# Altium PCB STM32F302VC_EVM.PcbDoc (part 9 of 19)
Units mil, origin at the board's own origin, x right, y up, seen from the top; angles counter-clockwise.
Board outline 3937.01 x 3937.01 mil, 2 copper layers (Top Layer, Bottom Layer); 117 components, 166 nets, 602 pads, 373 vias.
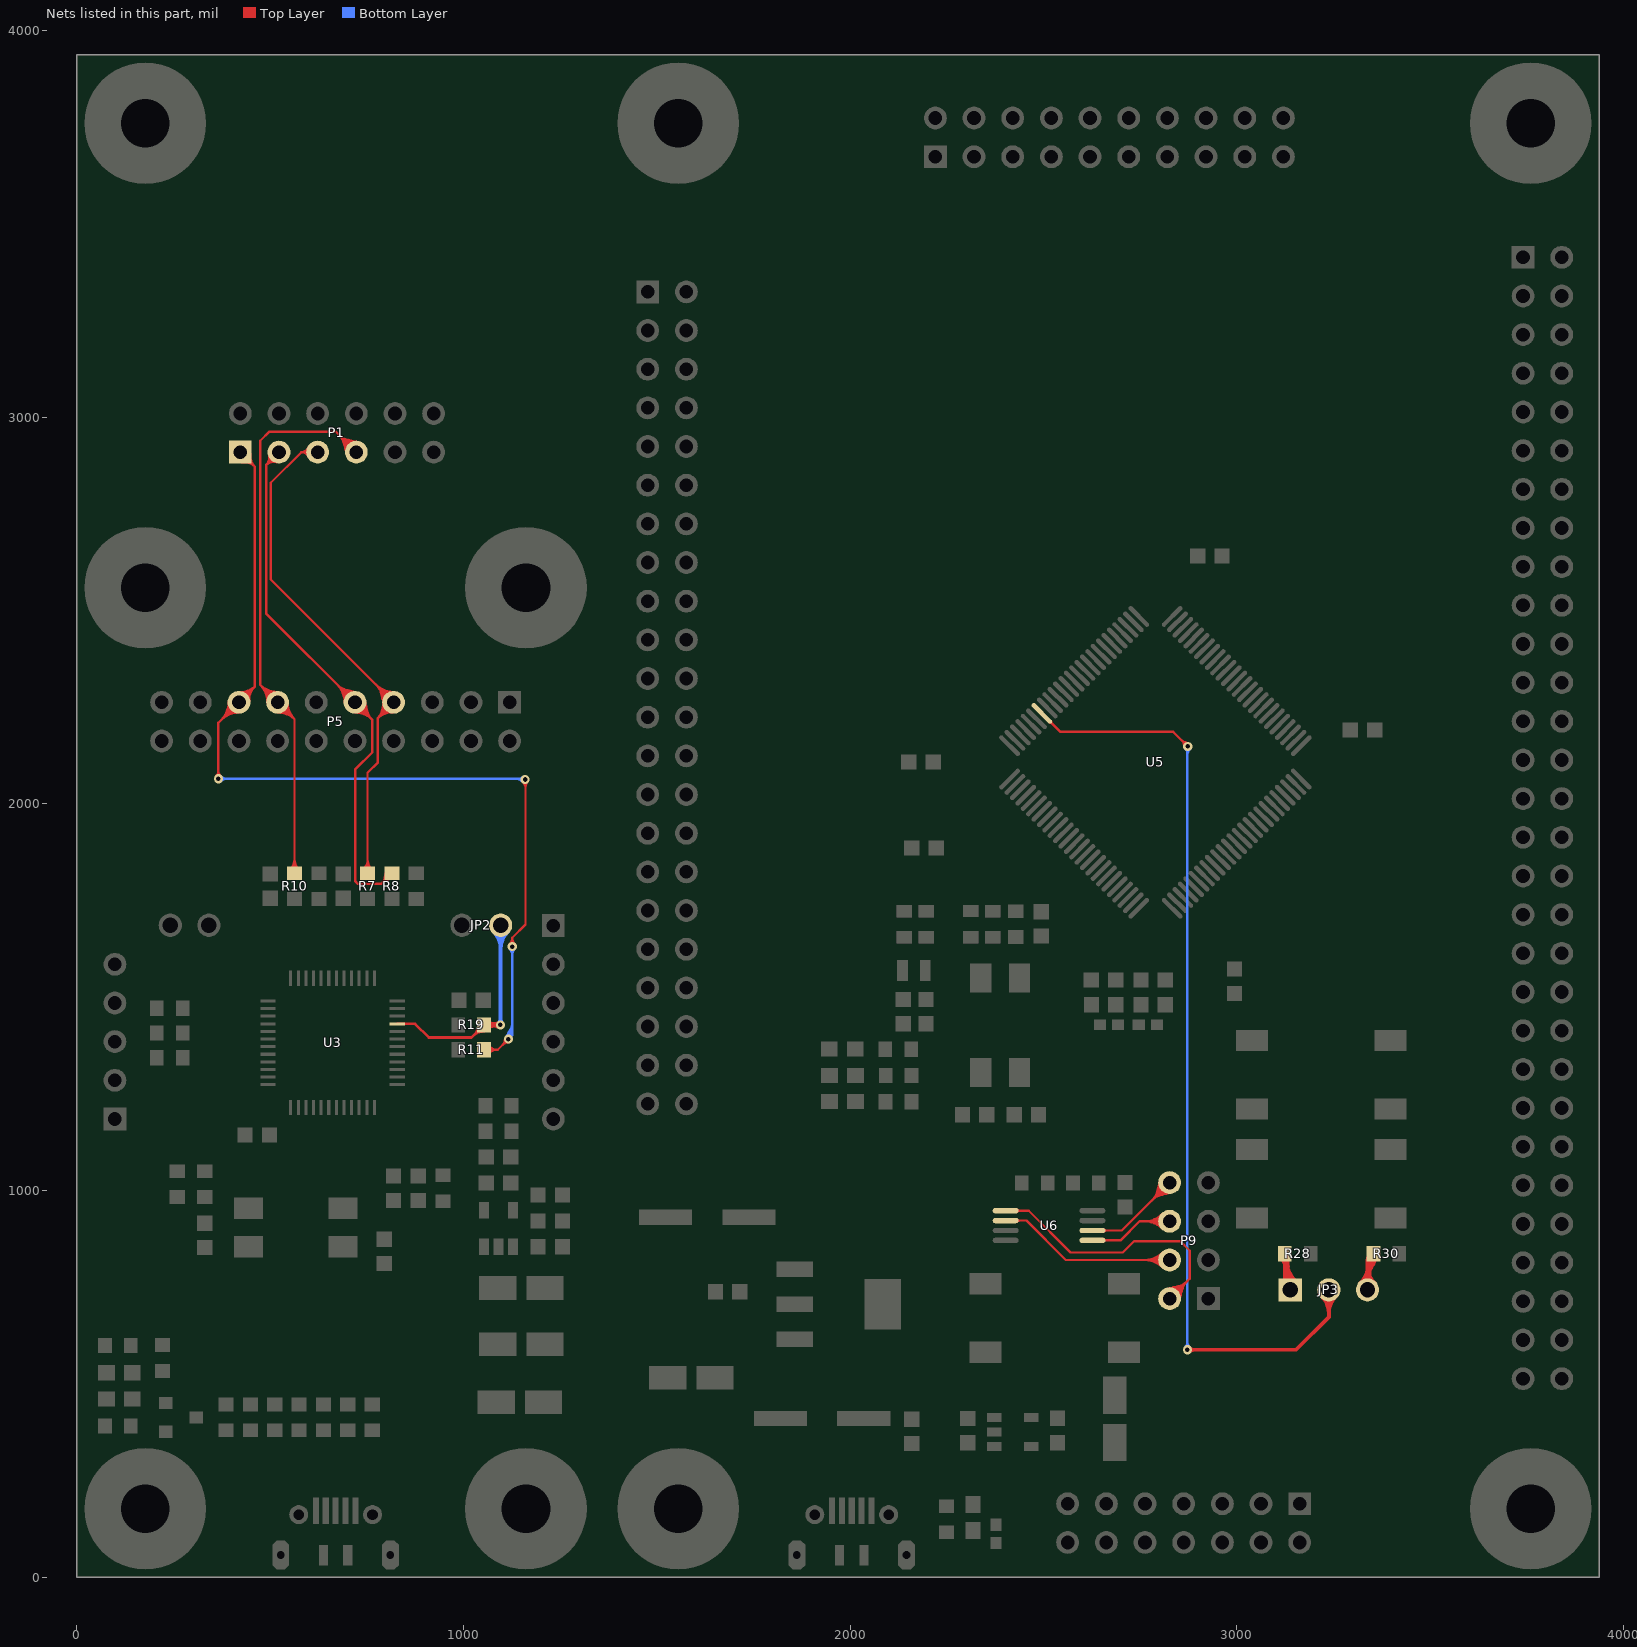
[diagram p9: the nets of this part, all layers, seen from the top]

## Via types
v1: diameter 23.62, hole 11.81, Top Layer to Bottom Layer, tented both sides, 372 vias
v2: diameter 50, hole 28, Top Layer to Bottom Layer, tented both sides, 1 vias

## Nets (pads, with @x,y where several pads share a name; then routed paths per layer and width w, separated by ;. In a path a pad name is that pad's centre, name@x,y a point inside that pad or via, vN(x,y) a via of type N, cw(c..) or ccw(c..) an arc to the next point about the centre after c; other vN are vias at no path point) (continued)
NetJP2_2: JP2.2 R19.2 U3.21 | length 1825.2
  Top Layer w7: U3.21@828.74,1431.1 875,1431.1 910.43,1395.67 1020.67,1395.67 R19.2@1053.15,1428.15 ; 1025.52,1400.52 cw(c1053.15,1372.89) R19.2@1053.15,1411.96 ; 1025.52,1400.52 cw(c1053.15,1372.89) R19.2@1053.15,1411.96 ; 1025.52,1400.52 cw(c1053.15,1372.89) R19.2@1053.15,1411.96 ; 1030.27,1405.27 ccw(c1009.36,1426.18) R19.2@1038.93,1426.18 ; 1030.27,1405.27 ccw(c1009.36,1426.18) R19.2@1038.93,1426.18 ; 1030.27,1405.27 ccw(c1009.36,1426.18) R19.2@1038.93,1426.18 ; 1034.36,1409.12 cw(c1056.66,1403.14) R19.2@1053.18,1425.97 ; 1034.36,1409.12 cw(c1056.66,1403.14) R19.2@1053.18,1425.97 ; 1034.36,1409.12 cw(c1056.66,1403.14) R19.2@1053.18,1425.97 ; R19.2@1037.47,1412.47 cw(c1053.15,1396.79) R19.2@1053.15,1418.96 ; R19.2@1037.47,1412.47 cw(c1053.15,1396.79) R19.2@1053.15,1418.96 ; R19.2@1037.47,1412.47 cw(c1053.15,1396.79) R19.2@1053.15,1418.96
  Top Layer w10: R19.2@1053.15,1428.15 v1(1095.47,1428.15) ; R19.2@1062.14,1419.16 cw(c1083.85,1397.45) v1@1083.85,1428.15 ; R19.2@1062.14,1419.16 cw(c1083.85,1397.45) v1@1083.85,1428.15 ; R19.2@1062.14,1419.16 cw(c1083.85,1397.45) v1@1083.85,1428.15 ; R19.2@1062.14,1437.14 ccw(c1083.85,1458.85) v1@1083.85,1428.15 ; R19.2@1062.14,1437.14 ccw(c1083.85,1458.85) v1@1083.85,1428.15 ; R19.2@1062.14,1437.14 ccw(c1083.85,1458.85) v1@1083.85,1428.15 ; 1073.53,1425.39 cw(c1079.37,1403.62) v1@1091.73,1422.46 ; 1073.53,1425.39 cw(c1079.37,1403.62) v1@1091.73,1422.46 ; 1073.53,1425.39 cw(c1079.37,1403.62) v1@1091.73,1422.46 ; 1073.53,1425.39 cw(c1079.37,1403.62) v1@1091.73,1422.46 ; 1073.53,1425.39 cw(c1079.37,1403.62) v1@1091.73,1422.46 ; 1073.53,1425.39 cw(c1079.37,1403.62) v1@1091.73,1422.46 ; 1073.53,1430.91 ccw(c1079.37,1452.68) v1@1091.73,1433.84 ; 1073.53,1430.91 ccw(c1079.37,1452.68) v1@1091.73,1433.84 ; 1073.53,1430.91 ccw(c1079.37,1452.68) v1@1091.73,1433.84 ; 1073.53,1430.91 ccw(c1079.37,1452.68) v1@1091.73,1433.84 ; 1073.53,1430.91 ccw(c1079.37,1452.68) v1@1091.73,1433.84 ; 1073.53,1430.91 ccw(c1079.37,1452.68) v1@1091.73,1433.84 ; 1079.03,1428.15 cw(c1079.03,1411.71) v1@1090.66,1423.33 ; 1079.03,1428.15 ccw(c1079.03,1444.59) v1@1090.66,1432.97 ; 1079.03,1428.15 ccw(c1079.03,1444.59) v1@1090.66,1432.97 ; 1079.03,1428.15 cw(c1079.03,1411.71) v1@1090.66,1423.33 ; 1079.03,1428.15 ccw(c1079.03,1444.59) v1@1090.66,1432.97 ; 1079.03,1428.15 cw(c1079.03,1411.71) v1@1090.66,1423.33
  Bottom Layer w10: v1@1096.06,1432.48 JP2.2@1096.06,1686.02 ; JP2.2@1078.39,1668.34 cw(c1035.71,1625.66) 1096.06,1625.66 ; JP2.2@1078.39,1668.34 cw(c1035.71,1625.66) 1096.06,1625.66 ; JP2.2@1078.39,1668.34 cw(c1035.71,1625.66) 1096.06,1625.66 ; JP2.2@1085.46,1675.41 cw(c1059.85,1649.8) 1096.06,1649.8 ; JP2.2@1085.46,1675.41 cw(c1059.85,1649.8) 1096.06,1649.8 ; JP2.2@1085.46,1675.41 cw(c1059.85,1649.8) 1096.06,1649.8 ; v1@1090.66,1432.97 ccw(c1077.6,1446.02) 1096.06,1446.02 ; v1@1090.66,1432.97 ccw(c1077.6,1446.02) 1096.06,1446.02 ; v1@1090.66,1432.97 ccw(c1077.6,1446.02) 1096.06,1446.02 ; 1096.06,1443.17 ccw(c1110.49,1443.17) v1@1100.29,1432.97 ; 1096.06,1443.17 ccw(c1110.49,1443.17) v1@1100.29,1432.97 ; 1096.06,1443.17 ccw(c1110.49,1443.17) v1@1100.29,1432.97 ; 1096.06,1625.66 cw(c1156.42,1625.66) JP2.2@1113.74,1668.34 ; 1096.06,1625.66 cw(c1156.42,1625.66) JP2.2@1113.74,1668.34 ; 1096.06,1625.66 cw(c1156.42,1625.66) JP2.2@1113.74,1668.34 ; 1096.06,1649.8 cw(c1132.28,1649.8) JP2.2@1106.67,1675.41 ; 1096.06,1649.8 cw(c1132.28,1649.8) JP2.2@1106.67,1675.41 ; 1096.06,1649.8 cw(c1132.28,1649.8) JP2.2@1106.67,1675.41
NetJP3_1: JP3.1 R28.1 | length 1007.6
  Top Layer w10: JP3.1@3137.8,743.11 3124.02,756.89 R28.1@3124.02,836.61 ; R28.1@3115.02,825.65 cw(c3093.32,803.95) 3124.02,803.95 ; R28.1@3115.02,825.65 cw(c3093.32,803.95) 3124.02,803.95 ; R28.1@3115.02,825.65 cw(c3093.32,803.95) 3124.02,803.95 ; R28.1@3117.36,823.81 cw(c3100.47,796.33) 3131.85,803.82 ; R28.1@3117.36,823.81 cw(c3100.47,796.33) 3131.85,803.82 ; R28.1@3117.36,823.81 cw(c3100.47,796.33) 3131.85,803.82 ; JP3.1@3120.12,760.79 ccw(c3110.71,770.2) JP3.1@3124.02,770.2 ; JP3.1@3120.12,760.79 ccw(c3110.71,770.2) JP3.1@3124.02,770.2 ; JP3.1@3120.12,760.79 ccw(c3110.71,770.2) JP3.1@3124.02,770.2 ; 3124.02,788.39 ccw(c3182.99,788.39) JP3.1@3141.33,746.65 ; 3124.02,788.39 ccw(c3182.99,788.39) JP3.1@3141.33,746.65 ; 3124.02,788.39 ccw(c3182.99,788.39) JP3.1@3141.33,746.65 ; 3124.02,803.95 cw(c3154.72,803.95) R28.1@3133.01,825.65 ; 3124.02,803.95 cw(c3154.72,803.95) R28.1@3133.01,825.65 ; 3124.02,803.95 cw(c3154.72,803.95) R28.1@3133.01,825.65 ; 3124.02,812.5 ccw(c3207.06,812.5) JP3.1@3148.39,753.73 ; 3124.02,812.5 ccw(c3207.06,812.5) JP3.1@3148.39,753.73 ; 3124.02,812.5 ccw(c3207.06,812.5) JP3.1@3148.39,753.73 ; R28.1@3124.02,836.61 ccw(c3231.12,836.61) JP3.1@3155.46,760.8 ; R28.1@3124.02,836.61 ccw(c3231.12,836.61) JP3.1@3155.46,760.8 ; R28.1@3124.02,836.61 ccw(c3231.12,836.61) JP3.1@3155.46,760.8 ; 3131.34,805.96 cw(c3159.68,812.73) R28.1@3134.85,827.99 ; 3131.34,805.96 cw(c3159.68,812.73) R28.1@3134.85,827.99 ; 3131.34,805.96 cw(c3159.68,812.73) R28.1@3134.85,827.99
NetJP3_2: JP3.2 U5.94 | length 3396.4
  Top Layer w6: U5.94@2495.67,2233.95 2543.6,2186.02 2835.63,2186.02 v1(2873.03,2148.62) ; U5.94@2516.55,2210.17 cw(c2516.55,2203.15) 2521.51,2208.11 ; U5.94@2516.55,2210.17 cw(c2516.55,2203.15) 2521.51,2208.11 ; U5.94@2516.55,2210.17 cw(c2516.55,2203.15) 2521.51,2208.11 ; U5.94@2519.45,2213.07 ccw(c2526.47,2213.07) 2521.51,2208.11 ; U5.94@2519.45,2213.07 ccw(c2526.47,2213.07) 2521.51,2208.11 ; U5.94@2519.45,2213.07 ccw(c2526.47,2213.07) 2521.51,2208.11 ; 2857.99,2163.66 cw(c2842.95,2148.62) v1@2864.22,2148.62 ; 2857.99,2163.66 ccw(c2873.03,2178.7) v1@2873.03,2157.43 ; 2857.99,2163.66 ccw(c2873.03,2178.7) v1@2873.03,2157.43 ; 2857.99,2163.66 cw(c2842.95,2148.62) v1@2864.22,2148.62 ; 2857.99,2163.66 ccw(c2873.03,2178.7) v1@2873.03,2157.43 ; 2857.99,2163.66 cw(c2842.95,2148.62) v1@2864.22,2148.62 ; 2862.58,2154.74 ccw(c2874.96,2158.06) v1@2872.39,2145.5 ; 2862.58,2154.74 ccw(c2874.96,2158.06) v1@2872.39,2145.5 ; 2862.58,2154.74 ccw(c2874.96,2158.06) v1@2872.39,2145.5 ; 2866.92,2159.07 cw(c2863.6,2146.69) v1@2876.16,2149.26 ; 2866.92,2159.07 cw(c2863.6,2146.69) v1@2876.16,2149.26 ; 2866.92,2159.07 cw(c2863.6,2146.69) v1@2876.16,2149.26
  Top Layer w10: v1(2871.86,588.14) 3153.1,588.14 3237.8,672.83 JP3.2@3237.8,743.11 ; v1@2876.67,583.32 cw(c2888.3,571.7) 2888.3,588.14 ; v1@2876.67,583.32 cw(c2888.3,571.7) 2888.3,588.14 ; v1@2876.67,583.32 cw(c2888.3,571.7) 2888.3,588.14 ; v1@2876.67,592.96 ccw(c2888.3,604.58) 2888.3,588.14 ; v1@2876.67,592.96 ccw(c2888.3,604.58) 2888.3,588.14 ; v1@2876.67,592.96 ccw(c2888.3,604.58) 2888.3,588.14 ; JP3.2@3220.12,725.43 cw(c3177.44,682.75) 3237.8,682.75 ; JP3.2@3220.12,725.43 cw(c3177.44,682.75) 3237.8,682.75 ; JP3.2@3220.12,725.43 cw(c3177.44,682.75) 3237.8,682.75 ; JP3.2@3227.19,732.5 cw(c3201.58,706.9) 3237.8,706.9 ; JP3.2@3227.19,732.5 cw(c3201.58,706.9) 3237.8,706.9 ; JP3.2@3227.19,732.5 cw(c3201.58,706.9) 3237.8,706.9 ; 3237.8,682.75 cw(c3298.15,682.75) JP3.2@3255.47,725.43 ; 3237.8,682.75 cw(c3298.15,682.75) JP3.2@3255.47,725.43 ; 3237.8,682.75 cw(c3298.15,682.75) JP3.2@3255.47,725.43 ; 3237.8,706.9 cw(c3274.01,706.9) JP3.2@3248.4,732.5 ; 3237.8,706.9 cw(c3274.01,706.9) JP3.2@3248.4,732.5 ; 3237.8,706.9 cw(c3274.01,706.9) JP3.2@3248.4,732.5
  Bottom Layer w6: v1(2871.86,588.14) 2871.86,2147.45 v1(2873.03,2148.62) ; v1@2865.63,594.37 ccw(c2850.59,609.41) 2871.86,609.41 ; v1@2865.63,594.37 ccw(c2850.59,609.41) 2871.86,609.41 ; v1@2865.63,594.37 ccw(c2850.59,609.41) 2871.86,609.41 ; v1@2866.8,2142.39 cw(c2854.59,2130.18) 2871.86,2130.18 ; v1@2866.8,2142.39 cw(c2854.59,2130.18) 2871.86,2130.18 ; v1@2866.8,2142.39 cw(c2854.59,2130.18) 2871.86,2130.18 ; 2871.86,609.41 ccw(c2893.13,609.41) v1@2878.09,594.37 ; 2871.86,609.41 ccw(c2893.13,609.41) v1@2878.09,594.37 ; 2871.86,609.41 ccw(c2893.13,609.41) v1@2878.09,594.37 ; 2871.86,2124.52 cw(c2897.14,2124.52) v1@2879.26,2142.39 ; 2871.86,2124.52 cw(c2897.14,2124.52) v1@2879.26,2142.39 ; 2871.86,2124.52 cw(c2897.14,2124.52) v1@2879.26,2142.39
NetJP3_3: JP3.3 R30.1 | length 1813.5
  Top Layer w10: JP3.3@3337.8,743.11 3337.8,821.06 R30.1@3353.35,836.61 ; JP3.3@3320.12,760.79 ccw(c3277.44,803.47) 3337.8,803.47 ; JP3.3@3320.12,760.79 ccw(c3277.44,803.47) 3337.8,803.47 ; JP3.3@3320.12,760.79 ccw(c3277.44,803.47) 3337.8,803.47 ; JP3.3@3324.42,764.23 ccw(c3301.45,800.5) 3343.34,791.1 ; JP3.3@3324.42,764.23 ccw(c3301.45,800.5) 3343.34,791.1 ; JP3.3@3324.42,764.23 ccw(c3301.45,800.5) 3343.34,791.1 ; JP3.3@3324.42,764.23 ccw(c3301.45,800.5) 3343.34,791.1 ; JP3.3@3324.42,764.23 ccw(c3301.45,800.5) 3343.34,791.1 ; JP3.3@3324.42,764.23 ccw(c3301.45,800.5) 3343.34,791.1 ; JP3.3@3327.19,753.72 ccw(c3301.58,779.32) 3337.8,779.32 ; JP3.3@3327.19,753.72 ccw(c3301.58,779.32) 3337.8,779.32 ; JP3.3@3327.19,753.72 ccw(c3301.58,779.32) 3337.8,779.32 ; JP3.3@3337.8,766.4 cw(c3421.59,766.4) R30.1@3362.34,825.65 ; JP3.3@3337.8,766.4 cw(c3421.59,766.4) R30.1@3362.34,825.65 ; JP3.3@3337.8,766.4 cw(c3421.59,766.4) R30.1@3362.34,825.65 ; 3337.8,779.32 ccw(c3374.01,779.32) JP3.3@3348.4,753.72 ; 3337.8,779.32 ccw(c3374.01,779.32) JP3.3@3348.4,753.72 ; 3337.8,779.32 ccw(c3374.01,779.32) JP3.3@3348.4,753.72 ; 3337.8,790.54 cw(c3397.45,790.54) R30.1@3355.27,832.72 ; 3337.8,790.54 cw(c3397.45,790.54) R30.1@3355.27,832.72 ; 3337.8,790.54 cw(c3397.45,790.54) R30.1@3355.27,832.72 ; 3337.8,803.47 ccw(c3398.15,803.47) JP3.3@3355.47,760.79 ; 3337.8,803.47 ccw(c3398.15,803.47) JP3.3@3355.47,760.79 ; 3337.8,803.47 ccw(c3398.15,803.47) JP3.3@3355.47,760.79 ; 3337.8,814.69 cw(c3373.31,814.69) R30.1@3348.2,839.8 ; 3337.8,814.69 cw(c3373.31,814.69) R30.1@3348.2,839.8 ; 3337.8,814.69 cw(c3373.31,814.69) R30.1@3348.2,839.8 ; 3339.93,775.93 ccw(c3360.72,771.26) JP3.3@3347.27,754.74 ; 3339.93,775.93 ccw(c3360.72,771.26) JP3.3@3347.27,754.74 ; 3339.93,775.93 ccw(c3360.72,771.26) JP3.3@3347.27,754.74 ; 3339.93,775.93 ccw(c3360.72,771.26) JP3.3@3347.27,754.74 ; 3339.93,775.93 ccw(c3360.72,771.26) JP3.3@3347.27,754.74 ; 3339.93,775.93 ccw(c3360.72,771.26) JP3.3@3347.27,754.74 ; 3340.59,807.3 ccw(c3319.44,819.5) R30.1@3341.74,829.46 ; 3340.59,807.3 ccw(c3319.44,819.5) R30.1@3341.74,829.46 ; 3340.59,807.3 ccw(c3319.44,819.5) R30.1@3341.74,829.46 ; R30.1@3343.08,827.14 cw(c3319.99,810.27) 3344.6,795.7 ; R30.1@3343.08,827.14 cw(c3319.99,810.27) 3344.6,795.7 ; R30.1@3343.08,827.14 cw(c3319.99,810.27) 3344.6,795.7 ; 3343.47,791.69 ccw(c3372.12,785.26) JP3.3@3353.58,762.5 ; 3343.47,791.69 ccw(c3372.12,785.26) JP3.3@3353.58,762.5 ; 3343.47,791.69 ccw(c3372.12,785.26) JP3.3@3353.58,762.5 ; 3343.47,791.69 ccw(c3372.12,785.26) JP3.3@3353.58,762.5 ; 3343.47,791.69 ccw(c3372.12,785.26) JP3.3@3353.58,762.5 ; 3343.47,791.69 ccw(c3372.12,785.26) JP3.3@3353.58,762.5 ; 3343.44,812.23 cw(c3362.27,801.36) R30.1@3356.64,822.36 ; 3343.44,812.23 cw(c3362.27,801.36) R30.1@3356.64,822.36 ; 3343.44,812.23 cw(c3362.27,801.36) R30.1@3356.64,822.36 ; R30.1@3351.15,833.04 cw(c3333.32,820.01) 3352.32,808.75 ; R30.1@3351.15,833.04 cw(c3333.32,820.01) 3352.32,808.75 ; R30.1@3351.15,833.04 cw(c3333.32,820.01) 3352.32,808.75
NetP1_1: P1.1 P5.15 R11.2 | length 6250
  Top Layer w6: v1(366.14,2064.96) 366.14,2209.45 P5.15@419.29,2262.6 460.44,2303.75 ; P1.1@422.83,2909.45 460.44,2871.84 ; R11.2@1053.15,1364.17 1088.58,1364.17 ; v1(1116.14,1391.73) 1088.58,1364.17 ; v1(1125.98,1630.91) 1125.98,1653.54 1160.43,1687.99 1160.43,2058.07 1155.51,2062.99 v1(1159.45,2062.99) ; v1@359.91,2071.19 ccw(c344.87,2086.23) 366.14,2086.23 ; v1@359.91,2071.19 ccw(c344.87,2086.23) 366.14,2086.23 ; v1@359.91,2071.19 ccw(c344.87,2086.23) 366.14,2086.23 ; 366.14,2086.23 ccw(c387.41,2086.23) v1@372.37,2071.19 ; 366.14,2086.23 ccw(c387.41,2086.23) v1@372.37,2071.19 ; 366.14,2086.23 ccw(c387.41,2086.23) v1@372.37,2071.19 ; 374.01,2217.31 cw(c419.29,2172.03) P5.15@419.29,2236.07 ; 374.01,2217.31 ccw(c328.72,2262.6) P5.15@392.76,2262.6 ; 374.01,2217.31 ccw(c328.72,2262.6) P5.15@392.76,2262.6 ; 374.01,2217.31 cw(c419.29,2172.03) P5.15@419.29,2236.07 ; 374.01,2217.31 ccw(c328.72,2262.6) P5.15@392.76,2262.6 ; 374.01,2217.31 cw(c419.29,2172.03) P5.15@419.29,2236.07 ; 384.25,2227.56 cw(c419.29,2192.51) P5.15@419.29,2242.07 ; 384.25,2227.56 ccw(c349.21,2262.6) P5.15@398.76,2262.6 ; 384.25,2227.56 ccw(c349.21,2262.6) P5.15@398.76,2262.6 ; 384.25,2227.56 cw(c419.29,2192.51) P5.15@419.29,2242.07 ; 384.25,2227.56 ccw(c349.21,2262.6) P5.15@398.76,2262.6 ; 384.25,2227.56 cw(c419.29,2192.51) P5.15@419.29,2242.07 ; 391.99,2237.31 cw(c421.77,2229.33) P5.15@419.48,2260.08 ; 391.99,2237.31 cw(c421.77,2229.33) P5.15@419.48,2260.08 ; 391.99,2237.31 cw(c421.77,2229.33) P5.15@419.48,2260.08 ; 394,2235.29 ccw(c386.02,2265.08) P5.15@416.77,2262.79 ; 394,2235.29 ccw(c386.02,2265.08) P5.15@416.77,2262.79 ; 394,2235.29 ccw(c386.02,2265.08) P5.15@416.77,2262.79 ; 394.18,2245.47 cw(c421.11,2238.26) P5.15@419.03,2266.06 ; 394.18,2245.47 cw(c421.11,2238.26) P5.15@419.03,2266.06 ; 394.18,2245.47 cw(c421.11,2238.26) P5.15@419.03,2266.06 ; 394.49,2237.8 cw(c419.29,2213) P5.15@419.29,2248.07 ; 394.49,2237.8 ccw(c369.69,2262.6) P5.15@404.76,2262.6 ; 394.49,2237.8 ccw(c369.69,2262.6) P5.15@404.76,2262.6 ; 394.49,2237.8 cw(c419.29,2213) P5.15@419.29,2248.07 ; 394.49,2237.8 ccw(c369.69,2262.6) P5.15@404.76,2262.6 ; 394.49,2237.8 cw(c419.29,2213) P5.15@419.29,2248.07 ; 402.17,2237.48 ccw(c394.95,2264.41) P5.15@422.75,2262.34 ; 402.17,2237.48 ccw(c394.95,2264.41) P5.15@422.75,2262.34 ; 402.17,2237.48 ccw(c394.95,2264.41) P5.15@422.75,2262.34 ; P5.15@415.94,2263.52 cw(c447.65,2254.8) 441.39,2287.09 ; P5.15@415.94,2263.52 cw(c447.65,2254.8) 441.39,2287.09 ; P5.15@415.94,2263.52 cw(c447.65,2254.8) 441.39,2287.09 ; P5.15@420.21,2259.25 ccw(c411.49,2290.96) 443.78,2284.69 ; P5.15@420.21,2259.25 ccw(c411.49,2290.96) 443.78,2284.69 ; P5.15@420.21,2259.25 ccw(c411.49,2290.96) 443.78,2284.69 ; P5.15@420.31,2277.09 ccw(c422.25,2304.71) 441.83,2285.13 ; P5.15@420.31,2277.09 ccw(c422.25,2304.71) 441.83,2285.13 ; P5.15@420.31,2277.09 ccw(c422.25,2304.71) 441.83,2285.13 ; P5.15@420.73,2283.08 ccw(c423.47,2322.11) 451.13,2294.44 ; P5.15@420.73,2283.08 ccw(c423.47,2322.11) 451.13,2294.44 ; P5.15@420.73,2283.08 ccw(c423.47,2322.11) 451.13,2294.44 ; P5.15@421.15,2289.06 ccw(c424.69,2339.5) 460.44,2303.75 ; P5.15@421.15,2289.06 ccw(c424.69,2339.5) 460.44,2303.75 ; P5.15@421.15,2289.06 ccw(c424.69,2339.5) 460.44,2303.75 ; P1.1@425.7,2889.12 cw(c430.02,2858.44) P1.1@451.93,2880.35 ; P1.1@425.7,2889.12 cw(c430.02,2858.44) P1.1@451.93,2880.35 ; P1.1@425.7,2889.12 cw(c430.02,2858.44) P1.1@451.93,2880.35 ; P1.1@426.54,2883.18 cw(c432.12,2843.53) 460.44,2871.84 ; P1.1@426.54,2883.18 cw(c432.12,2843.53) 460.44,2871.84 ; P1.1@426.54,2883.18 cw(c432.12,2843.53) 460.44,2871.84 ; P5.15@433.78,2263.62 cw(c461.41,2265.55) 441.83,2285.13 ; P5.15@433.78,2263.62 cw(c461.41,2265.55) 441.83,2285.13 ; P5.15@433.78,2263.62 cw(c461.41,2265.55) 441.83,2285.13 ; P5.15@439.77,2264.03 cw(c478.8,2266.77) 451.13,2294.44 ; P5.15@439.77,2264.03 cw(c478.8,2266.77) 451.13,2294.44 ; P5.15@439.77,2264.03 cw(c478.8,2266.77) 451.13,2294.44 ; P1.1@443.16,2906.58 ccw(c473.84,2902.26) P1.1@451.93,2880.35 ; P1.1@443.16,2906.58 ccw(c473.84,2902.26) P1.1@451.93,2880.35 ; P1.1@443.16,2906.58 ccw(c473.84,2902.26) P1.1@451.93,2880.35 ; P5.15@445.75,2264.45 cw(c496.19,2267.99) 460.44,2303.75 ; P5.15@445.75,2264.45 cw(c496.19,2267.99) 460.44,2303.75 ; P5.15@445.75,2264.45 cw(c496.19,2267.99) 460.44,2303.75 ; P1.1@449.1,2905.75 ccw(c488.75,2900.16) 460.44,2871.84 ; P1.1@449.1,2905.75 ccw(c488.75,2900.16) 460.44,2871.84 ; P1.1@449.1,2905.75 ccw(c488.75,2900.16) 460.44,2871.84 ; 460.44,2303.75 460.44,2871.84 ; R11.2@1059.33,1358.02 cw(c1074.14,1343.27) 1074.14,1364.17 ; R11.2@1059.33,1358.02 cw(c1074.14,1343.27) 1074.14,1364.17 ; R11.2@1059.33,1358.02 cw(c1074.14,1343.27) 1074.14,1364.17 ; R11.2@1059.33,1370.32 ccw(c1074.14,1385.08) 1074.14,1364.17 ; R11.2@1059.33,1370.32 ccw(c1074.14,1385.08) 1074.14,1364.17 ; R11.2@1059.33,1370.32 ccw(c1074.14,1385.08) 1074.14,1364.17 ; R11.2@1063.58,1353.79 cw(c1088.58,1328.88) 1088.58,1364.17 ; R11.2@1063.58,1353.79 cw(c1088.58,1328.88) 1088.58,1364.17 ; R11.2@1063.58,1353.79 cw(c1088.58,1328.88) 1088.58,1364.17 ; R11.2@1063.58,1374.56 ccw(c1088.58,1399.47) 1088.58,1364.17 ; R11.2@1063.58,1374.56 ccw(c1088.58,1399.47) 1088.58,1364.17 ; R11.2@1063.58,1374.56 ccw(c1088.58,1399.47) 1088.58,1364.17 ; 1101.1,1376.69 cw(c1116.14,1361.65) v1@1116.14,1382.92 ; 1101.1,1376.69 ccw(c1086.06,1391.73) v1@1107.33,1391.73 ; 1101.1,1376.69 ccw(c1086.06,1391.73) v1@1107.33,1391.73 ; 1101.1,1376.69 cw(c1116.14,1361.65) v1@1116.14,1382.92 ; 1101.1,1376.69 ccw(c1086.06,1391.73) v1@1107.33,1391.73 ; 1101.1,1376.69 cw(c1116.14,1361.65) v1@1116.14,1382.92 ; v1@1119.75,1637.14 ccw(c1104.71,1652.18) 1125.98,1652.18 ; v1@1119.75,1637.14 ccw(c1104.71,1652.18) 1125.98,1652.18 ; v1@1119.75,1637.14 ccw(c1104.71,1652.18) 1125.98,1652.18 ; 1125.98,1652.18 ccw(c1147.26,1652.18) v1@1132.21,1637.14 ; 1125.98,1652.18 ccw(c1147.26,1652.18) v1@1132.21,1637.14 ; 1125.98,1652.18 ccw(c1147.26,1652.18) v1@1132.21,1637.14 ; v1@1153.22,2056.76 cw(c1135.8,2039.34) 1160.43,2039.34 ; v1@1153.22,2056.76 cw(c1135.8,2039.34) 1160.43,2039.34 ; v1@1153.22,2056.76 cw(c1135.8,2039.34) 1160.43,2039.34 ; 1160.43,2044.1 cw(c1178.34,2044.1) v1@1165.68,2056.76 ; 1160.43,2044.1 cw(c1178.34,2044.1) v1@1165.68,2056.76 ; 1160.43,2044.1 cw(c1178.34,2044.1) v1@1165.68,2056.76
  Bottom Layer w6: v1(366.14,2064.96) 1157.48,2064.96 v1(1159.45,2062.99) ; v1(1116.14,1391.73) 1125.98,1401.57 v1(1125.98,1630.91) ; v1@372.37,2058.73 cw(c387.41,2043.69) 387.41,2064.96 ; v1@372.37,2058.73 cw(c387.41,2043.69) 387.41,2064.96 ; v1@372.37,2058.73 cw(c387.41,2043.69) 387.41,2064.96 ; v1@372.37,2071.19 ccw(c387.41,2086.23) 387.41,2064.96 ; v1@372.37,2071.19 ccw(c387.41,2086.23) 387.41,2064.96 ; v1@372.37,2071.19 ccw(c387.41,2086.23) 387.41,2064.96 ; v1@1109.91,1397.96 ccw(c1071.11,1436.77) 1125.98,1436.77 ; v1@1109.91,1397.96 ccw(c1071.11,1436.77) 1125.98,1436.77 ; v1@1109.91,1397.96 ccw(c1071.11,1436.77) 1125.98,1436.77 ; v1@1113.86,1400.24 ccw(c1110.76,1411.84) 1121.15,1405.83 ; v1@1113.86,1400.24 ccw(c1110.76,1411.84) 1121.15,1405.83 ; v1@1113.86,1400.24 ccw(c1110.76,1411.84) 1121.15,1405.83 ; v1@1114.15,1393.72 ccw(c1085.59,1422.28) 1125.98,1422.28 ; v1@1114.15,1393.72 ccw(c1085.59,1422.28) 1125.98,1422.28 ; v1@1114.15,1393.72 ccw(c1085.59,1422.28) 1125.98,1422.28 ; 1116.78,1409.12 ccw(c1127.81,1402.33) v1@1118.22,1393.62 ; 1116.78,1409.12 ccw(c1127.81,1402.33) v1@1118.22,1393.62 ; 1116.78,1409.12 ccw(c1127.81,1402.33) v1@1118.22,1393.62 ; v1@1118.4,1389.48 ccw(c1100.08,1407.8) 1125.98,1407.8 ; v1@1118.4,1389.48 ccw(c1100.08,1407.8) 1125.98,1407.8 ; v1@1118.4,1389.48 ccw(c1100.08,1407.8) 1125.98,1407.8 ; v1@1119.75,1624.68 cw(c1104.71,1609.63) 1125.98,1609.63 ; v1@1119.75,1624.68 cw(c1104.71,1609.63) 1125.98,1609.63 ; v1@1119.75,1624.68 cw(c1104.71,1609.63) 1125.98,1609.63 ; 1120.96,1415.92 ccw(c1133.96,1407.92) v1@1122.66,1397.66 ; 1120.96,1415.92 ccw(c1133.96,1407.92) v1@1122.66,1397.66 ; 1120.96,1415.92 ccw(c1133.96,1407.92) v1@1122.66,1397.66 ; v1@1123.79,1396.1 cw(c1136.31,1403.26) 1123.82,1410.47 ; v1@1123.79,1396.1 cw(c1136.31,1403.26) 1123.82,1410.47 ; v1@1123.79,1396.1 cw(c1136.31,1403.26) 1123.82,1410.47 ; 1125.98,1609.63 cw(c1147.26,1609.63) v1@1132.21,1624.68 ; 1125.98,1609.63 cw(c1147.26,1609.63) v1@1132.21,1624.68 ; 1125.98,1609.63 cw(c1147.26,1609.63) v1@1132.21,1624.68 ; 1133.42,2064.96 cw(c1133.42,2036.97) v1@1153.22,2056.76 ; 1133.42,2064.96 cw(c1133.42,2036.97) v1@1153.22,2056.76 ; 1133.42,2064.96 cw(c1133.42,2036.97) v1@1153.22,2056.76 ; 1142.93,2064.96 ccw(c1142.93,2079.51) v1@1153.22,2069.22 ; 1142.93,2064.96 ccw(c1142.93,2079.51) v1@1153.22,2069.22 ; 1142.93,2064.96 ccw(c1142.93,2079.51) v1@1153.22,2069.22
NetP1_3: P1.3 P5.9 R8.2 | length 5274
  Top Layer w6: P1.3@522.83,2909.45 489.57,2876.19 ; R8.2@814.96,1820.87 787.4,1793.31 ; 489.57,2876.19 cw(c509.68,2856.08) P1.3@516.49,2883.69 ; 489.57,2876.19 ccw(c469.46,2896.3) P1.3@497.08,2903.1 ; 489.57,2876.19 ccw(c469.46,2896.3) P1.3@497.08,2903.1 ; 489.57,2876.19 cw(c509.68,2856.08) P1.3@516.49,2883.69 ; 489.57,2876.19 ccw(c469.46,2896.3) P1.3@497.08,2903.1 ; 489.57,2876.19 cw(c509.68,2856.08) P1.3@516.49,2883.69 ; 489.57,2876.19 489.57,2492.32 P5.9@719.29,2262.6 763.78,2218.11 ; 496.72,2885.46 cw(c546.84,2884.45) P1.3@512.12,2920.61 ; 496.72,2885.46 cw(c546.84,2884.45) P1.3@512.12,2920.61 ; 496.72,2885.46 cw(c546.84,2884.45) P1.3@512.12,2920.61 ; 497.1,2883.71 cw(c512.66,2868.15) P1.3@517.92,2889.52 ; 497.1,2883.71 ccw(c481.53,2899.27) P1.3@502.9,2904.54 ; 497.1,2883.71 ccw(c481.53,2899.27) P1.3@502.9,2904.54 ; 497.1,2883.71 cw(c512.66,2868.15) P1.3@517.92,2889.52 ; 497.1,2883.71 ccw(c481.53,2899.27) P1.3@502.9,2904.54 ; 497.1,2883.71 cw(c512.66,2868.15) P1.3@517.92,2889.52 ; 498.85,2883.34 ccw(c497.84,2933.46) P1.3@533.99,2898.73 ; 498.85,2883.34 ccw(c497.84,2933.46) P1.3@533.99,2898.73 ; 498.85,2883.34 ccw(c497.84,2933.46) P1.3@533.99,2898.73 ; 674.01,2307.88 cw(c628.72,2262.6) P5.9@692.76,2262.6 ; 674.01,2307.88 ccw(c719.29,2353.17) P5.9@719.29,2289.13 ; 674.01,2307.88 ccw(c719.29,2353.17) P5.9@719.29,2289.13 ; 674.01,2307.88 cw(c628.72,2262.6) P5.9@692.76,2262.6 ; 674.01,2307.88 ccw(c719.29,2353.17) P5.9@719.29,2289.13 ; 674.01,2307.88 cw(c628.72,2262.6) P5.9@692.76,2262.6 ; 684.25,2297.64 cw(c649.21,2262.6) P5.9@698.76,2262.6 ; 684.25,2297.64 ccw(c719.29,2332.68) P5.9@719.29,2283.13 ; 684.25,2297.64 ccw(c719.29,2332.68) P5.9@719.29,2283.13 ; 684.25,2297.64 cw(c649.21,2262.6) P5.9@698.76,2262.6 ; 684.25,2297.64 ccw(c719.29,2332.68) P5.9@719.29,2283.13 ; 684.25,2297.64 cw(c649.21,2262.6) P5.9@698.76,2262.6 ; 691.3,2296.63 cw(c680.03,2254.56) P5.9@722.69,2263.3 ; 691.3,2296.63 cw(c680.03,2254.56) P5.9@722.69,2263.3 ; 691.3,2296.63 cw(c680.03,2254.56) P5.9@722.69,2263.3 ; 691.99,2287.89 ccw(c721.77,2295.87) P5.9@719.48,2265.12 ; 691.99,2287.89 ccw(c721.77,2295.87) P5.9@719.48,2265.12 ; 691.99,2287.89 ccw(c721.77,2295.87) P5.9@719.48,2265.12 ; 694,2289.9 cw(c686.02,2260.12) P5.9@716.77,2262.41 ; 694,2289.9 cw(c686.02,2260.12) P5.9@716.77,2262.41 ; 694,2289.9 cw(c686.02,2260.12) P5.9@716.77,2262.41 ; 694.18,2279.72 ccw(c721.11,2286.94) P5.9@719.03,2259.14 ; 694.18,2279.72 ccw(c721.11,2286.94) P5.9@719.03,2259.14 ; 694.18,2279.72 ccw(c721.11,2286.94) P5.9@719.03,2259.14 ; 694.49,2287.4 cw(c669.69,2262.6) P5.9@704.76,2262.6 ; 694.49,2287.4 ccw(c719.29,2312.2) P5.9@719.29,2277.13 ; 694.49,2287.4 ccw(c719.29,2312.2) P5.9@719.29,2277.13 ; 694.49,2287.4 cw(c669.69,2262.6) P5.9@704.76,2262.6 ; 694.49,2287.4 ccw(c719.29,2312.2) P5.9@719.29,2277.13 ; 694.49,2287.4 cw(c669.69,2262.6) P5.9@704.76,2262.6 ; 700.68,2294.11 cw(c690.66,2256.74) P5.9@728.57,2264.5 ; 700.68,2294.11 cw(c690.66,2256.74) P5.9@728.57,2264.5 ; 700.68,2294.11 cw(c690.66,2256.74) P5.9@728.57,2264.5 ; 702.17,2287.71 cw(c694.95,2260.78) P5.9@722.75,2262.86 ; 702.17,2287.71 cw(c694.95,2260.78) P5.9@722.75,2262.86 ; 702.17,2287.71 cw(c694.95,2260.78) P5.9@722.75,2262.86 ; 710.06,2291.6 cw(c701.3,2258.91) P5.9@734.45,2265.7 ; 710.06,2291.6 cw(c701.3,2258.91) P5.9@734.45,2265.7 ; 710.06,2291.6 cw(c701.3,2258.91) P5.9@734.45,2265.7 ; P5.9@715.84,2262.25 ccw(c744.08,2265.13) 737.08,2237.61 ; P5.9@715.84,2262.25 ccw(c744.08,2265.13) 737.08,2237.61 ; P5.9@715.84,2262.25 ccw(c744.08,2265.13) 737.08,2237.61 ; P5.9@719.03,2260.08 cw(c715.83,2228.71) 746.39,2236.49 ; P5.9@719.03,2260.08 cw(c715.83,2228.71) 746.39,2236.49 ; P5.9@719.03,2260.08 cw(c715.83,2228.71) 746.39,2236.49 ; P5.9@719.48,2248.07 cw(c719.9,2214.48) 743.65,2238.24 ; P5.9@719.48,2248.07 cw(c719.9,2214.48) 743.65,2238.24 ; P5.9@719.48,2248.07 cw(c719.9,2214.48) 743.65,2238.24 ; P5.9@719.55,2242.07 cw(c720.15,2194.61) 753.72,2228.17 ; P5.9@719.55,2242.07 cw(c720.15,2194.61) 753.72,2228.17 ; P5.9@719.55,2242.07 cw(c720.15,2194.61) 753.72,2228.17 ; P5.9@719.63,2236.07 cw(c720.4,2174.74) 763.78,2218.11 ; P5.9@719.63,2236.07 cw(c720.4,2174.74) 763.78,2218.11 ; P5.9@719.63,2236.07 cw(c720.4,2174.74) 763.78,2218.11 ; P5.9@719.64,2266.05 cw(c716.76,2237.81) 744.28,2244.81 ; P5.9@719.64,2266.05 cw(c716.76,2237.81) 744.28,2244.81 ; P5.9@719.64,2266.05 cw(c716.76,2237.81) 744.28,2244.81 ; P5.9@720.08,2265.98 cw(c710.01,2222.67) 753.1,2233.63 ; P5.9@720.08,2265.98 cw(c710.01,2222.67) 753.1,2233.63 ; P5.9@720.08,2265.98 cw(c710.01,2222.67) 753.1,2233.63 ; P5.9@721.44,2271.82 cw(c712.52,2233.49) 750.67,2243.19 ; P5.9@721.44,2271.82 cw(c712.52,2233.49) 750.67,2243.19 ; P5.9@721.44,2271.82 cw(c712.52,2233.49) 750.67,2243.19 ; P5.9@721.81,2262.85 ccw(c753.18,2266.06) 745.4,2235.5 ; P5.9@721.81,2262.85 ccw(c753.18,2266.06) 745.4,2235.5 ; P5.9@721.81,2262.85 ccw(c753.18,2266.06) 745.4,2235.5 ; P5.9@722.8,2277.67 cw(c715.04,2244.3) 748.24,2252.75 ; P5.9@722.8,2277.67 cw(c715.04,2244.3) 748.24,2252.75 ; P5.9@722.8,2277.67 cw(c715.04,2244.3) 748.24,2252.75 ; P5.9@733.82,2262.41 ccw(c767.41,2261.99) 743.65,2238.24 ; P5.9@733.82,2262.41 ccw(c767.41,2261.99) 743.65,2238.24 ; P5.9@733.82,2262.41 ccw(c767.41,2261.99) 743.65,2238.24 ; P5.9@739.82,2262.34 ccw(c787.28,2261.74) 753.72,2228.17 ; P5.9@739.82,2262.34 ccw(c787.28,2261.74) 753.72,2228.17 ; P5.9@739.82,2262.34 ccw(c787.28,2261.74) 753.72,2228.17 ; P5.9@745.82,2262.26 ccw(c807.15,2261.49) 763.78,2218.11 ; P5.9@745.82,2262.26 ccw(c807.15,2261.49) 763.78,2218.11 ; P5.9@745.82,2262.26 ccw(c807.15,2261.49) 763.78,2218.11 ; 763.78,2218.11 763.78,2133.06 720.47,2089.76 720.47,1799.02 726.18,1793.31 787.4,1793.31 ; 787.4,1793.31 ccw(c761.12,1819.59) R8.2@798.28,1820.51 ; 787.4,1793.31 ccw(c761.12,1819.59) R8.2@798.28,1820.51 ; 787.4,1793.31 ccw(c761.12,1819.59) R8.2@798.28,1820.51 ; 791.23,1797.14 cw(c812.99,1775.37) R8.2@812.99,1806.15 ; 791.23,1797.14 cw(c812.99,1775.37) R8.2@812.99,1806.15 ; 791.23,1797.14 cw(c812.99,1775.37) R8.2@812.99,1806.15 ; R8.2@797.3,1803.21 ccw(c780.44,1820.07) R8.2@804.28,1820.65 ; R8.2@797.3,1803.21 ccw(c780.44,1820.07) R8.2@804.28,1820.65 ; R8.2@797.3,1803.21 ccw(c780.44,1820.07) R8.2@804.28,1820.65 ; 800.48,1802.8 ccw(c794.89,1823.66) R8.2@816.24,1820.37 ; 800.48,1802.8 ccw(c794.89,1823.66) R8.2@816.24,1820.37 ; 800.48,1802.8 ccw(c794.89,1823.66) R8.2@816.24,1820.37 ; R8.2@801.47,1807.38 cw(c812.99,1795.86) R8.2@812.99,1812.15 ; R8.2@801.47,1807.38 cw(c812.99,1795.86) R8.2@812.99,1812.15 ; R8.2@801.47,1807.38 cw(c812.99,1795.86) R8.2@812.99,1812.15
NetP1_5: P1.5 P5.7 R7.2 | length 4415
  Top Layer w6: P1.5@622.83,2909.45 580.71,2909.45 ; R7.2@751.97,1820.87 751.97,2080.12 778.54,2106.69 778.54,2221.85 ; 580.71,2909.45 cw(c580.71,2889.27) P1.5@598.91,2897.99 ; 580.71,2909.45 ccw(c580.71,2929.63) P1.5@598.91,2920.91 ; 580.71,2909.45 ccw(c580.71,2929.63) P1.5@598.91,2920.91 ; 580.71,2909.45 cw(c580.71,2889.27) P1.5@598.91,2897.99 ; 580.71,2909.45 ccw(c580.71,2929.63) P1.5@598.91,2920.91 ; 580.71,2909.45 cw(c580.71,2889.27) P1.5@598.91,2897.99 ; 580.71,2909.45 501.57,2830.31 501.57,2580.32 P5.7@819.29,2262.6 778.54,2221.85 ; 590.24,2909.45 cw(c590.24,2893.83) P1.5@604.32,2900.58 ; 590.24,2909.45 ccw(c590.24,2925.07) P1.5@604.32,2918.32 ; 590.24,2909.45 ccw(c590.24,2925.07) P1.5@604.32,2918.32 ; 590.24,2909.45 cw(c590.24,2893.83) P1.5@604.32,2900.58 ; 590.24,2909.45 ccw(c590.24,2925.07) P1.5@604.32,2918.32 ; 590.24,2909.45 cw(c590.24,2893.83) P1.5@604.32,2900.58 ; R7.2@741.56,1831.27 ccw(c716.44,1856.39) 751.97,1856.39 ; R7.2@741.56,1831.27 ccw(c716.44,1856.39) 751.97,1856.39 ; R7.2@741.56,1831.27 ccw(c716.44,1856.39) 751.97,1856.39 ; R7.2@745.81,1827.03 ccw(c730.92,1841.91) 751.97,1841.91 ; R7.2@745.81,1827.03 ccw(c730.92,1841.91) 751.97,1841.91 ; R7.2@745.81,1827.03 ccw(c730.92,1841.91) 751.97,1841.91 ; 751.97,1841.91 ccw(c773.01,1841.91) R7.2@758.13,1827.03 ; 751.97,1841.91 ccw(c773.01,1841.91) R7.2@758.13,1827.03 ; 751.97,1841.91 ccw(c773.01,1841.91) R7.2@758.13,1827.03 ; 751.97,1856.39 ccw(c787.5,1856.39) R7.2@762.37,1831.27 ; 751.97,1856.39 ccw(c787.5,1856.39) R7.2@762.37,1831.27 ; 751.97,1856.39 ccw(c787.5,1856.39) R7.2@762.37,1831.27 ; 774.01,2307.88 cw(c728.72,2262.6) P5.7@792.76,2262.6 ; 774.01,2307.88 ccw(c819.29,2353.17) P5.7@819.29,2289.13 ; 774.01,2307.88 ccw(c819.29,2353.17) P5.7@819.29,2289.13 ; 774.01,2307.88 cw(c728.72,2262.6) P5.7@792.76,2262.6 ; 774.01,2307.88 ccw(c819.29,2353.17) P5.7@819.29,2289.13 ; 774.01,2307.88 cw(c728.72,2262.6) P5.7@792.76,2262.6 ; 778.55,2221.85 cw(c813.42,2186.98) P5.7@817.24,2236.15 ; 778.55,2221.85 ccw(c743.67,2256.73) P5.7@792.84,2260.55 ; 778.55,2221.85 ccw(c743.67,2256.73) P5.7@792.84,2260.55 ; 778.55,2221.85 cw(c813.42,2186.98) P5.7@817.24,2236.15 ; 778.55,2221.85 ccw(c743.67,2256.73) P5.7@792.84,2260.55 ; 778.55,2221.85 cw(c813.42,2186.98) P5.7@817.24,2236.15 ; 784.25,2297.64 cw(c749.21,2262.6) P5.7@798.76,2262.6 ; 784.25,2297.64 ccw(c819.29,2332.68) P5.7@819.29,2283.13 ; 784.25,2297.64 ccw(c819.29,2332.68) P5.7@819.29,2283.13 ; 784.25,2297.64 cw(c749.21,2262.6) P5.7@798.76,2262.6 ; 784.25,2297.64 ccw(c819.29,2332.68) P5.7@819.29,2283.13 ; 784.25,2297.64 cw(c749.21,2262.6) P5.7@798.76,2262.6 ; 785.26,2290.59 ccw(c827.33,2301.86) P5.7@818.59,2259.2 ; 785.26,2290.59 ccw(c827.33,2301.86) P5.7@818.59,2259.2 ; 785.26,2290.59 ccw(c827.33,2301.86) P5.7@818.59,2259.2 ; 787.76,2231.07 cw(c814.75,2204.08) P5.7@817.7,2242.13 ; 787.76,2231.07 ccw(c760.77,2258.06) P5.7@798.83,2261.01 ; 787.76,2231.07 ccw(c760.77,2258.06) P5.7@798.83,2261.01 ; 787.76,2231.07 cw(c814.75,2204.08) P5.7@817.7,2242.13 ; 787.76,2231.07 ccw(c760.77,2258.06) P5.7@798.83,2261.01 ; 787.76,2231.07 cw(c814.75,2204.08) P5.7@817.7,2242.13 ; 787.78,2281.21 ccw(c825.15,2291.23) P5.7@817.39,2253.32 ; 787.78,2281.21 ccw(c825.15,2291.23) P5.7@817.39,2253.32 ; 787.78,2281.21 ccw(c825.15,2291.23) P5.7@817.39,2253.32 ; 788.5,2237.24 cw(c834.2,2228.72) P5.7@815.48,2271.27 ; 788.5,2237.24 cw(c834.2,2228.72) P5.7@815.48,2271.27 ; 788.5,2237.24 cw(c834.2,2228.72) P5.7@815.48,2271.27 ; 790.29,2271.83 ccw(c822.98,2280.59) P5.7@816.19,2247.44 ; 790.29,2271.83 ccw(c822.98,2280.59) P5.7@816.19,2247.44 ; 790.29,2271.83 ccw(c822.98,2280.59) P5.7@816.19,2247.44 ; 790.58,2248.4 cw(c828.66,2241.3) P5.7@813.06,2276.76 ; 790.58,2248.4 cw(c828.66,2241.3) P5.7@813.06,2276.76 ; 790.58,2248.4 cw(c828.66,2241.3) P5.7@813.06,2276.76 ; 791.99,2287.89 ccw(c821.77,2295.87) P5.7@819.48,2265.12 ; 791.99,2287.89 ccw(c821.77,2295.87) P5.7@819.48,2265.12 ; 791.99,2287.89 ccw(c821.77,2295.87) P5.7@819.48,2265.12 ; 794,2289.9 cw(c786.02,2260.12) P5.7@816.77,2262.41 ; 794,2289.9 cw(c786.02,2260.12) P5.7@816.77,2262.41 ; 794,2289.9 cw(c786.02,2260.12) P5.7@816.77,2262.41 ; 794.18,2279.72 ccw(c821.11,2286.94) P5.7@819.03,2259.14 ; 794.18,2279.72 ccw(c821.11,2286.94) P5.7@819.03,2259.14 ; 794.18,2279.72 ccw(c821.11,2286.94) P5.7@819.03,2259.14 ; 794.49,2287.4 cw(c769.69,2262.6) P5.7@804.76,2262.6 ; 794.49,2287.4 ccw(c819.29,2312.2) P5.7@819.29,2277.13 ; 794.49,2287.4 ccw(c819.29,2312.2) P5.7@819.29,2277.13 ; 794.49,2287.4 cw(c769.69,2262.6) P5.7@804.76,2262.6 ; 794.49,2287.4 ccw(c819.29,2312.2) P5.7@819.29,2277.13 ; 794.49,2287.4 cw(c769.69,2262.6) P5.7@804.76,2262.6 ; 794.86,2239.74 cw(c828.15,2233.53) P5.7@818.28,2265.92 ; 794.86,2239.74 cw(c828.15,2233.53) P5.7@818.28,2265.92 ; 794.86,2239.74 cw(c828.15,2233.53) P5.7@818.28,2265.92 ; 796.43,2238.17 ccw(c790.22,2271.45) P5.7@822.61,2261.59 ; 796.43,2238.17 ccw(c790.22,2271.45) P5.7@822.61,2261.59 ; 796.43,2238.17 ccw(c790.22,2271.45) P5.7@822.61,2261.59 ; 796.98,2240.28 cw(c816.08,2221.19) P5.7@818.17,2248.11 ; 796.98,2240.28 ccw(c777.88,2259.38) P5.7@804.81,2261.47 ; 796.98,2240.28 ccw(c777.88,2259.38) P5.7@804.81,2261.47 ; 796.98,2240.28 cw(c816.08,2221.19) P5.7@818.17,2248.11 ; 796.98,2240.28 ccw(c777.88,2259.38) P5.7@804.81,2261.47 ; 796.98,2240.28 cw(c816.08,2221.19) P5.7@818.17,2248.11 ; 802.17,2287.71 cw(c794.95,2260.78) P5.7@822.75,2262.86 ; 802.17,2287.71 cw(c794.95,2260.78) P5.7@822.75,2262.86 ; 802.17,2287.71 cw(c794.95,2260.78) P5.7@822.75,2262.86
NetP1_7: P1.7 P5.13 R10.2 | length 5608.8
  Top Layer w6: R10.2@562.99,1820.87 562.99,2218.9 ; P1.7@722.83,2909.45 669.68,2962.6 498.03,2962.6 474.41,2938.98 474.41,2307.48 ; 474.41,2307.48 cw(c430.1,2263.17) P5.13@492.76,2262.77 ; 474.41,2307.48 ccw(c518.72,2351.79) P5.13@519.12,2289.13 ; 474.41,2307.48 ccw(c518.72,2351.79) P5.13@519.12,2289.13 ; 474.41,2307.48 cw(c430.1,2263.17) P5.13@492.76,2262.77 ; 474.41,2307.48 ccw(c518.72,2351.79) P5.13@519.12,2289.13 ; 474.41,2307.48 cw(c430.1,2263.17) P5.13@492.76,2262.77 ; 474.41,2307.48 P5.13@519.29,2262.6 562.99,2218.9 ; 484.56,2297.33 cw(c450.28,2263.04) P5.13@498.76,2262.73 ; 484.56,2297.33 ccw(c518.85,2331.61) P5.13@519.16,2283.13 ; 484.56,2297.33 ccw(c518.85,2331.61) P5.13@519.16,2283.13 ; 484.56,2297.33 cw(c450.28,2263.04) P5.13@498.76,2262.73 ; 484.56,2297.33 ccw(c518.85,2331.61) P5.13@519.16,2283.13 ; 484.56,2297.33 cw(c450.28,2263.04) P5.13@498.76,2262.73 ; 492.09,2288.29 ccw(c522.25,2296.16) P5.13@519.51,2265.12 ; 492.09,2288.29 ccw(c522.25,2296.16) P5.13@519.51,2265.12 ; 492.09,2288.29 ccw(c522.25,2296.16) P5.13@519.51,2265.12 ; 493.6,2289.8 cw(c485.73,2259.64) P5.13@516.77,2262.38 ; 493.6,2289.8 cw(c485.73,2259.64) P5.13@516.77,2262.38 ; 493.6,2289.8 cw(c485.73,2259.64) P5.13@516.77,2262.38 ; 494.24,2280.05 ccw(c521.45,2287.15) P5.13@518.99,2259.14 ; 494.24,2280.05 ccw(c521.45,2287.15) P5.13@518.99,2259.14 ; 494.24,2280.05 ccw(c521.45,2287.15) P5.13@518.99,2259.14 ; 494.71,2287.18 cw(c470.45,2262.91) P5.13@504.76,2262.69 ; 494.71,2287.18 ccw(c518.98,2311.44) P5.13@519.2,2277.13 ; 494.71,2287.18 ccw(c518.98,2311.44) P5.13@519.2,2277.13 ; 494.71,2287.18 cw(c470.45,2262.91) P5.13@504.76,2262.69 ; 494.71,2287.18 ccw(c518.98,2311.44) P5.13@519.2,2277.13 ; 494.71,2287.18 cw(c470.45,2262.91) P5.13@504.76,2262.69 ; 501.84,2287.65 cw(c494.74,2260.44) P5.13@522.75,2262.9 ; 501.84,2287.65 cw(c494.74,2260.44) P5.13@522.75,2262.9 ; 501.84,2287.65 cw(c494.74,2260.44) P5.13@522.75,2262.9 ; P5.13@515.85,2262.14 ccw(c544.65,2265.98) 537.85,2237.74 ; P5.13@515.85,2262.14 ccw(c544.65,2265.98) 537.85,2237.74 ; P5.13@515.85,2262.14 ccw(c544.65,2265.98) 537.85,2237.74 ; P5.13@519.66,2248.08 cw(c520.48,2215.93) 543.22,2238.67 ; P5.13@519.66,2248.08 cw(c520.48,2215.93) 543.22,2238.67 ; P5.13@519.66,2248.08 cw(c520.48,2215.93) 543.22,2238.67 ; P5.13@519.75,2266.04 cw(c515.91,2237.24) 544.15,2244.04 ; P5.13@519.75,2266.04 cw(c515.91,2237.24) 544.15,2244.04 ; P5.13@519.75,2266.04 cw(c515.91,2237.24) 544.15,2244.04 ; P5.13@519.82,2242.08 cw(c520.98,2196.65) 553.11,2228.78 ; P5.13@519.82,2242.08 cw(c520.98,2196.65) 553.11,2228.78 ; P5.13@519.82,2242.08 cw(c520.98,2196.65) 553.11,2228.78 ; P5.13@519.97,2236.08 cw(c521.47,2177.38) 562.99,2218.9 ; P5.13@519.97,2236.08 cw(c521.47,2177.38) 562.99,2218.9 ; P5.13@519.97,2236.08 cw(c521.47,2177.38) 562.99,2218.9 ; P5.13@533.81,2262.23 ccw(c565.96,2261.41) 543.22,2238.67 ; P5.13@533.81,2262.23 ccw(c565.96,2261.41) 543.22,2238.67 ; P5.13@533.81,2262.23 ccw(c565.96,2261.41) 543.22,2238.67 ; P5.13@539.81,2262.07 ccw(c585.24,2260.91) 553.11,2228.78 ; P5.13@539.81,2262.07 ccw(c585.24,2260.91) 553.11,2228.78 ; P5.13@539.81,2262.07 ccw(c585.24,2260.91) 553.11,2228.78 ; P5.13@545.81,2261.92 ccw(c604.51,2260.42) 562.99,2218.9 ; P5.13@545.81,2261.92 ccw(c604.51,2260.42) 562.99,2218.9 ; P5.13@545.81,2261.92 ccw(c604.51,2260.42) 562.99,2218.9 ; R10.2@552.59,1831.27 ccw(c527.46,1856.39) 562.99,1856.39 ; R10.2@552.59,1831.27 ccw(c527.46,1856.39) 562.99,1856.39 ; R10.2@552.59,1831.27 ccw(c527.46,1856.39) 562.99,1856.39 ; R10.2@556.83,1827.03 ccw(c541.95,1841.91) 562.99,1841.91 ; R10.2@556.83,1827.03 ccw(c541.95,1841.91) 562.99,1841.91 ; R10.2@556.83,1827.03 ccw(c541.95,1841.91) 562.99,1841.91 ; 562.99,1841.91 ccw(c584.04,1841.91) R10.2@569.16,1827.03 ; 562.99,1841.91 ccw(c584.04,1841.91) R10.2@569.16,1827.03 ; 562.99,1841.91 ccw(c584.04,1841.91) R10.2@569.16,1827.03 ; 562.99,1856.39 ccw(c598.52,1856.39) R10.2@573.4,1831.27 ; 562.99,1856.39 ccw(c598.52,1856.39) R10.2@573.4,1831.27 ; 562.99,1856.39 ccw(c598.52,1856.39) R10.2@573.4,1831.27 ; 677.55,2954.73 cw(c632.26,2909.45) P1.7@696.31,2909.45 ; 677.55,2954.73 ccw(c722.83,3000.02) P1.7@722.83,2935.98 ; 677.55,2954.73 ccw(c722.83,3000.02) P1.7@722.83,2935.98 ; 677.55,2954.73 cw(c632.26,2909.45) P1.7@696.31,2909.45 ; 677.55,2954.73 ccw(c722.83,3000.02) P1.7@722.83,2935.98 ; 677.55,2954.73 cw(c632.26,2909.45) P1.7@696.31,2909.45 ; 687.79,2944.49 cw(c652.75,2909.45) P1.7@702.31,2909.45 ; 687.79,2944.49 ccw(c722.83,2979.53) P1.7@722.83,2929.98 ; 687.79,2944.49 ccw(c722.83,2979.53) P1.7@722.83,2929.98 ; 687.79,2944.49 cw(c652.75,2909.45) P1.7@702.31,2909.45 ; 687.79,2944.49 ccw(c722.83,2979.53) P1.7@722.83,2929.98 ; 687.79,2944.49 cw(c652.75,2909.45) P1.7@702.31,2909.45 ; 688.81,2937.44 ccw(c730.88,2948.71) P1.7@722.14,2906.05 ; 688.81,2937.44 ccw(c730.88,2948.71) P1.7@722.14,2906.05 ; 688.81,2937.44 ccw(c730.88,2948.71) P1.7@722.14,2906.05 ; 691.32,2928.06 ccw(c728.7,2938.08) P1.7@720.93,2900.17 ; 691.32,2928.06 ccw(c728.7,2938.08) P1.7@720.93,2900.17 ; 691.32,2928.06 ccw(c728.7,2938.08) P1.7@720.93,2900.17 ; 693.83,2918.68 ccw(c726.52,2927.44) P1.7@719.73,2894.29 ; 693.83,2918.68 ccw(c726.52,2927.44) P1.7@719.73,2894.29 ; 693.83,2918.68 ccw(c726.52,2927.44) P1.7@719.73,2894.29 ; 694.84,2943.48 cw(c683.57,2901.41) P1.7@726.24,2910.15 ; 694.84,2943.48 cw(c683.57,2901.41) P1.7@726.24,2910.15 ; 694.84,2943.48 cw(c683.57,2901.41) P1.7@726.24,2910.15 ; 695.53,2934.74 ccw(c725.32,2942.72) P1.7@723.02,2911.97 ; 695.53,2934.74 ccw(c725.32,2942.72) P1.7@723.02,2911.97 ; 695.53,2934.74 ccw(c725.32,2942.72) P1.7@723.02,2911.97 ; 697.54,2936.75 cw(c689.56,2906.97) P1.7@720.31,2909.26 ; 697.54,2936.75 cw(c689.56,2906.97) P1.7@720.31,2909.26 ; 697.54,2936.75 cw(c689.56,2906.97) P1.7@720.31,2909.26 ; 697.72,2926.57 ccw(c724.65,2933.79) P1.7@722.58,2905.99 ; 697.72,2926.57 ccw(c724.65,2933.79) P1.7@722.58,2905.99 ; 697.72,2926.57 ccw(c724.65,2933.79) P1.7@722.58,2905.99 ; 698.03,2934.25 cw(c673.23,2909.45) P1.7@708.31,2909.45 ; 698.03,2934.25 ccw(c722.83,2959.05) P1.7@722.83,2923.98 ; 698.03,2934.25 ccw(c722.83,2959.05) P1.7@722.83,2923.98 ; 698.03,2934.25 cw(c673.23,2909.45) P1.7@708.31,2909.45 ; 698.03,2934.25 ccw(c722.83,2959.05) P1.7@722.83,2923.98 ; 698.03,2934.25 cw(c673.23,2909.45) P1.7@708.31,2909.45 ; 704.22,2940.96 cw(c694.2,2903.59) P1.7@732.11,2911.35 ; 704.22,2940.96 cw(c694.2,2903.59) P1.7@732.11,2911.35 ; 704.22,2940.96 cw(c694.2,2903.59) P1.7@732.11,2911.35 ; 705.71,2934.56 cw(c698.49,2907.63) P1.7@726.3,2909.71 ; 705.71,2934.56 cw(c698.49,2907.63) P1.7@726.3,2909.71 ; 705.71,2934.56 cw(c698.49,2907.63) P1.7@726.3,2909.71 ; 713.6,2938.45 cw(c704.84,2905.76) P1.7@737.99,2912.55 ; 713.6,2938.45 cw(c704.84,2905.76) P1.7@737.99,2912.55 ; 713.6,2938.45 cw(c704.84,2905.76) P1.7@737.99,2912.55
NetP9_2: P9.2 U6.1 | length 2639.6
  Top Layer w6: U6.1@2402.05,947.83 2461.61,947.83 2569.88,839.57 2704.72,839.57 2734.38,869.22 2853.22,869.22 2877.95,844.49 2877.95,772.24 P9.2@2826.18,720.47 ; U6.1@2431.37,945.08 cw(c2438.01,938.44) 2438.01,947.83 ; U6.1@2431.37,945.08 cw(c2438.01,938.44) 2438.01,947.83 ; U6.1@2431.37,945.08 cw(c2438.01,938.44) 2438.01,947.83 ; U6.1@2431.37,950.58 ccw(c2438.01,957.23) 2438.01,947.83 ; U6.1@2431.37,950.58 ccw(c2438.01,957.23) 2438.01,947.83 ; U6.1@2431.37,950.58 ccw(c2438.01,957.23) 2438.01,947.83 ; P9.2@2811.02,723.58 cw(c2844.18,716.79) 2835.42,749.47 ; P9.2@2811.02,723.58 cw(c2844.18,716.79) 2835.42,749.47 ; P9.2@2811.02,723.58 cw(c2844.18,716.79) 2835.42,749.47 ; P9.2@2816.9,722.37 cw(c2854.81,714.61) 2844.8,751.99 ; P9.2@2816.9,722.37 cw(c2854.81,714.61) 2844.8,751.99 ; P9.2@2816.9,722.37 cw(c2854.81,714.61) 2844.8,751.99 ; P9.2@2822.72,720.73 cw(c2850.52,718.66) 2843.31,745.59 ; P9.2@2822.72,720.73 cw(c2850.52,718.66) 2843.31,745.59 ; P9.2@2822.72,720.73 cw(c2850.52,718.66) 2843.31,745.59 ; P9.2@2822.78,721.17 cw(c2865.45,712.43) 2854.17,754.5 ; P9.2@2822.78,721.17 cw(c2865.45,712.43) 2854.17,754.5 ; P9.2@2822.78,721.17 cw(c2865.45,712.43) 2854.17,754.5 ; P9.2@2825.99,722.99 ccw(c2823.7,753.74) 2853.48,745.76 ; P9.2@2825.99,722.99 ccw(c2823.7,753.74) 2853.48,745.76 ; P9.2@2825.99,722.99 ccw(c2823.7,753.74) 2853.48,745.76 ; P9.2@2826.18,735 ccw(c2826.18,770.07) 2850.98,745.27 ; P9.2@2826.18,735 ccw(c2826.18,770.07) 2850.98,745.27 ; P9.2@2826.18,735 ccw(c2826.18,770.07) 2850.98,745.27 ; P9.2@2826.18,741 ccw(c2826.18,790.56) 2861.22,755.52 ; P9.2@2826.18,741 ccw(c2826.18,790.56) 2861.22,755.52 ; P9.2@2826.18,741 ccw(c2826.18,790.56) 2861.22,755.52 ; P9.2@2826.18,747 ccw(c2826.18,811.04) 2871.47,765.76 ; P9.2@2826.18,747 ccw(c2826.18,811.04) 2871.47,765.76 ; P9.2@2826.18,747 ccw(c2826.18,811.04) 2871.47,765.76 ; P9.2@2826.44,717.01 ccw(c2824.37,744.81) 2851.3,737.6 ; P9.2@2826.44,717.01 ccw(c2824.37,744.81) 2851.3,737.6 ; P9.2@2826.44,717.01 ccw(c2824.37,744.81) 2851.3,737.6 ; P9.2@2826.88,717.07 ccw(c2818.14,759.74) 2860.21,748.47 ; P9.2@2826.88,717.07 ccw(c2818.14,759.74) 2860.21,748.47 ; P9.2@2826.88,717.07 ccw(c2818.14,759.74) 2860.21,748.47 ; P9.2@2828.08,711.19 ccw(c2820.32,749.1) 2857.7,739.09 ; P9.2@2828.08,711.19 ccw(c2820.32,749.1) 2857.7,739.09 ; P9.2@2828.08,711.19 ccw(c2820.32,749.1) 2857.7,739.09 ; P9.2@2828.7,720.28 cw(c2859.45,717.99) 2851.47,747.78 ; P9.2@2828.7,720.28 cw(c2859.45,717.99) 2851.47,747.78 ; P9.2@2828.7,720.28 cw(c2859.45,717.99) 2851.47,747.78 ; P9.2@2829.28,705.31 ccw(c2822.5,738.47) 2855.18,729.71 ; P9.2@2829.28,705.31 ccw(c2822.5,738.47) 2855.18,729.71 ; P9.2@2829.28,705.31 ccw(c2822.5,738.47) 2855.18,729.71 ; P9.2@2840.71,720.47 cw(c2875.78,720.47) 2850.98,745.27 ; P9.2@2840.71,720.47 cw(c2875.78,720.47) 2850.98,745.27 ; P9.2@2840.71,720.47 cw(c2875.78,720.47) 2850.98,745.27 ; P9.2@2846.71,720.47 cw(c2896.27,720.47) 2861.22,755.52 ; P9.2@2846.71,720.47 cw(c2896.27,720.47) 2861.22,755.52 ; P9.2@2846.71,720.47 cw(c2896.27,720.47) 2861.22,755.52 ; P9.2@2852.71,720.47 cw(c2916.75,720.47) 2871.47,765.76 ; P9.2@2852.71,720.47 cw(c2916.75,720.47) 2871.47,765.76 ; P9.2@2852.71,720.47 cw(c2916.75,720.47) 2871.47,765.76
NetP9_4: P9.4 U6.2 | length 1211.1
  Top Layer w6: U6.2@2402.05,922.24 2455.71,922.24 2557.48,820.47 P9.4@2826.18,820.47 ; U6.2@2431.37,919.49 cw(c2438.01,912.85) 2438.01,922.24 ; U6.2@2431.37,919.49 cw(c2438.01,912.85) 2438.01,922.24 ; U6.2@2431.37,919.49 cw(c2438.01,912.85) 2438.01,922.24 ; U6.2@2431.37,924.99 ccw(c2438.01,931.63) 2438.01,922.24 ; U6.2@2431.37,924.99 ccw(c2438.01,931.63) 2438.01,922.24 ; U6.2@2431.37,924.99 ccw(c2438.01,931.63) 2438.01,922.24 ; 2762.14,820.47 cw(c2762.14,756.43) P9.4@2807.42,801.71 ; 2762.14,820.47 ccw(c2762.14,884.52) P9.4@2807.42,839.23 ; 2762.14,820.47 ccw(c2762.14,884.52) P9.4@2807.42,839.23 ; 2762.14,820.47 cw(c2762.14,756.43) P9.4@2807.42,801.71 ; 2762.14,820.47 ccw(c2762.14,884.52) P9.4@2807.42,839.23 ; 2762.14,820.47 cw(c2762.14,756.43) P9.4@2807.42,801.71 ; 2776.62,820.47 cw(c2776.62,770.91) P9.4@2811.67,805.96 ; 2776.62,820.47 ccw(c2776.62,870.03) P9.4@2811.67,834.99 ; 2776.62,820.47 ccw(c2776.62,870.03) P9.4@2811.67,834.99 ; 2776.62,820.47 cw(c2776.62,770.91) P9.4@2811.67,805.96 ; 2776.62,820.47 ccw(c2776.62,870.03) P9.4@2811.67,834.99 ; 2776.62,820.47 cw(c2776.62,770.91) P9.4@2811.67,805.96 ; 2791.11,820.47 cw(c2791.11,785.4) P9.4@2815.91,810.2 ; 2791.11,820.47 ccw(c2791.11,855.54) P9.4@2815.91,830.74 ; 2791.11,820.47 ccw(c2791.11,855.54) P9.4@2815.91,830.74 ; 2791.11,820.47 cw(c2791.11,785.4) P9.4@2815.91,810.2 ; 2791.11,820.47 ccw(c2791.11,855.54) P9.4@2815.91,830.74 ; 2791.11,820.47 cw(c2791.11,785.4) P9.4@2815.91,810.2
NetP9_6: P9.6 U6.5 | length 965
  Top Layer w6: U6.5@2626.46,871.06 2698.82,871.06 2748.23,920.47 P9.6@2826.18,920.47 ; U6.5@2655.78,868.31 cw(c2662.42,861.67) 2662.42,871.06 ; U6.5@2655.78,868.31 cw(c2662.42,861.67) 2662.42,871.06 ; U6.5@2655.78,868.31 cw(c2662.42,861.67) 2662.42,871.06 ; U6.5@2655.78,873.81 ccw(c2662.42,880.45) 2662.42,871.06 ; U6.5@2655.78,873.81 ccw(c2662.42,880.45) 2662.42,871.06 ; U6.5@2655.78,873.81 ccw(c2662.42,880.45) 2662.42,871.06 ; 2762.14,920.47 cw(c2762.14,856.43) P9.6@2807.42,901.71 ; 2762.14,920.47 ccw(c2762.14,984.52) P9.6@2807.42,939.23 ; 2762.14,920.47 ccw(c2762.14,984.52) P9.6@2807.42,939.23 ; 2762.14,920.47 cw(c2762.14,856.43) P9.6@2807.42,901.71 ; 2762.14,920.47 ccw(c2762.14,984.52) P9.6@2807.42,939.23 ; 2762.14,920.47 cw(c2762.14,856.43) P9.6@2807.42,901.71 ; 2776.62,920.47 cw(c2776.62,870.91) P9.6@2811.67,905.96 ; 2776.62,920.47 ccw(c2776.62,970.03) P9.6@2811.67,934.99 ; 2776.62,920.47 ccw(c2776.62,970.03) P9.6@2811.67,934.99 ; 2776.62,920.47 cw(c2776.62,870.91) P9.6@2811.67,905.96 ; 2776.62,920.47 ccw(c2776.62,970.03) P9.6@2811.67,934.99 ; 2776.62,920.47 cw(c2776.62,870.91) P9.6@2811.67,905.96 ; 2791.11,920.47 cw(c2791.11,885.4) P9.6@2815.91,910.2 ; 2791.11,920.47 ccw(c2791.11,955.54) P9.6@2815.91,930.74 ; 2791.11,920.47 ccw(c2791.11,955.54) P9.6@2815.91,930.74 ; 2791.11,920.47 cw(c2791.11,885.4) P9.6@2815.91,910.2 ; 2791.11,920.47 ccw(c2791.11,955.54) P9.6@2815.91,930.74 ; 2791.11,920.47 cw(c2791.11,885.4) P9.6@2815.91,910.2
NetP9_8: P9.8 U6.6 | length 2201.9
  Top Layer w6: U6.6@2626.46,896.65 2702.36,896.65 P9.8@2826.18,1020.47 ; U6.6@2655.78,893.9 cw(c2662.42,887.26) 2662.42,896.65 ; U6.6@2655.78,893.9 cw(c2662.42,887.26) 2662.42,896.65 ; U6.6@2655.78,893.9 cw(c2662.42,887.26) 2662.42,896.65 ; U6.6@2655.78,899.4 ccw(c2662.42,906.04) 2662.42,896.65 ; U6.6@2655.78,899.4 ccw(c2662.42,906.04) 2662.42,896.65 ; U6.6@2655.78,899.4 ccw(c2662.42,906.04) 2662.42,896.65 ; 2780.9,975.19 cw(c2826.18,929.9) P9.8@2826.18,993.94 ; 2780.9,975.19 ccw(c2735.61,1020.47) P9.8@2799.65,1020.47 ; 2780.9,975.19 ccw(c2735.61,1020.47) P9.8@2799.65,1020.47 ; 2780.9,975.19 cw(c2826.18,929.9) P9.8@2826.18,993.94 ; 2780.9,975.19 ccw(c2735.61,1020.47) P9.8@2799.65,1020.47 ; 2780.9,975.19 cw(c2826.18,929.9) P9.8@2826.18,993.94 ; 2791.14,985.43 cw(c2826.18,950.39) P9.8@2826.18,999.94 ; 2791.14,985.43 ccw(c2756.1,1020.47) P9.8@2805.65,1020.47 ; 2791.14,985.43 ccw(c2756.1,1020.47) P9.8@2805.65,1020.47 ; 2791.14,985.43 cw(c2826.18,950.39) P9.8@2826.18,999.94 ; 2791.14,985.43 ccw(c2756.1,1020.47) P9.8@2805.65,1020.47 ; 2791.14,985.43 cw(c2826.18,950.39) P9.8@2826.18,999.94 ; 2792.15,992.48 cw(c2834.22,981.21) P9.8@2825.48,1023.87 ; 2792.15,992.48 cw(c2834.22,981.21) P9.8@2825.48,1023.87 ; 2792.15,992.48 cw(c2834.22,981.21) P9.8@2825.48,1023.87 ; 2794.67,1001.86 cw(c2832.04,991.84) P9.8@2824.28,1029.75 ; 2794.67,1001.86 cw(c2832.04,991.84) P9.8@2824.28,1029.75 ; 2794.67,1001.86 cw(c2832.04,991.84) P9.8@2824.28,1029.75 ; 2797.18,1011.24 cw(c2829.87,1002.48) P9.8@2823.08,1035.63 ; 2797.18,1011.24 cw(c2829.87,1002.48) P9.8@2823.08,1035.63 ; 2797.18,1011.24 cw(c2829.87,1002.48) P9.8@2823.08,1035.63 ; 2798.19,986.44 ccw(c2786.92,1028.51) P9.8@2829.58,1019.78 ; 2798.19,986.44 ccw(c2786.92,1028.51) P9.8@2829.58,1019.78 ; 2798.19,986.44 ccw(c2786.92,1028.51) P9.8@2829.58,1019.78 ; 2798.88,995.18 cw(c2828.66,987.2) P9.8@2826.37,1017.95 ; 2798.88,995.18 cw(c2828.66,987.2) P9.8@2826.37,1017.95 ; 2798.88,995.18 cw(c2828.66,987.2) P9.8@2826.37,1017.95 ; 2800.89,993.17 ccw(c2792.91,1022.95) P9.8@2823.66,1020.66 ; 2800.89,993.17 ccw(c2792.91,1022.95) P9.8@2823.66,1020.66 ; 2800.89,993.17 ccw(c2792.91,1022.95) P9.8@2823.66,1020.66 ; 2801.06,1003.35 cw(c2828,996.13) P9.8@2825.92,1023.94 ; 2801.06,1003.35 cw(c2828,996.13) P9.8@2825.92,1023.94 ; 2801.06,1003.35 cw(c2828,996.13) P9.8@2825.92,1023.94 ; 2801.38,995.67 cw(c2826.18,970.87) P9.8@2826.18,1005.94 ; 2801.38,995.67 ccw(c2776.58,1020.47) P9.8@2811.65,1020.47 ; 2801.38,995.67 ccw(c2776.58,1020.47) P9.8@2811.65,1020.47 ; 2801.38,995.67 cw(c2826.18,970.87) P9.8@2826.18,1005.94 ; 2801.38,995.67 ccw(c2776.58,1020.47) P9.8@2811.65,1020.47 ; 2801.38,995.67 cw(c2826.18,970.87) P9.8@2826.18,1005.94 ; 2807.57,988.96 ccw(c2797.55,1026.34) P9.8@2835.46,1018.57 ; 2807.57,988.96 ccw(c2797.55,1026.34) P9.8@2835.46,1018.57 ; 2807.57,988.96 ccw(c2797.55,1026.34) P9.8@2835.46,1018.57 ; 2809.06,995.36 ccw(c2801.84,1022.29) P9.8@2829.64,1020.21 ; 2809.06,995.36 ccw(c2801.84,1022.29) P9.8@2829.64,1020.21 ; 2809.06,995.36 ccw(c2801.84,1022.29) P9.8@2829.64,1020.21 ; 2816.95,991.47 ccw(c2808.19,1024.16) P9.8@2841.34,1017.37 ; 2816.95,991.47 ccw(c2808.19,1024.16) P9.8@2841.34,1017.37 ; 2816.95,991.47 ccw(c2808.19,1024.16) P9.8@2841.34,1017.37